# Altium PCB seed_sentinel.PcbDoc
Units mm, origin at the board's own origin, x right, y up, seen from the top; angles counter-clockwise.
Board outline 24.35 x 76.07 mm, 2 copper layers (Top Layer, Bottom Layer); 50 components, 33 nets, 167 pads, 51 vias.
Unrouted connection lines stored in the file: 31.
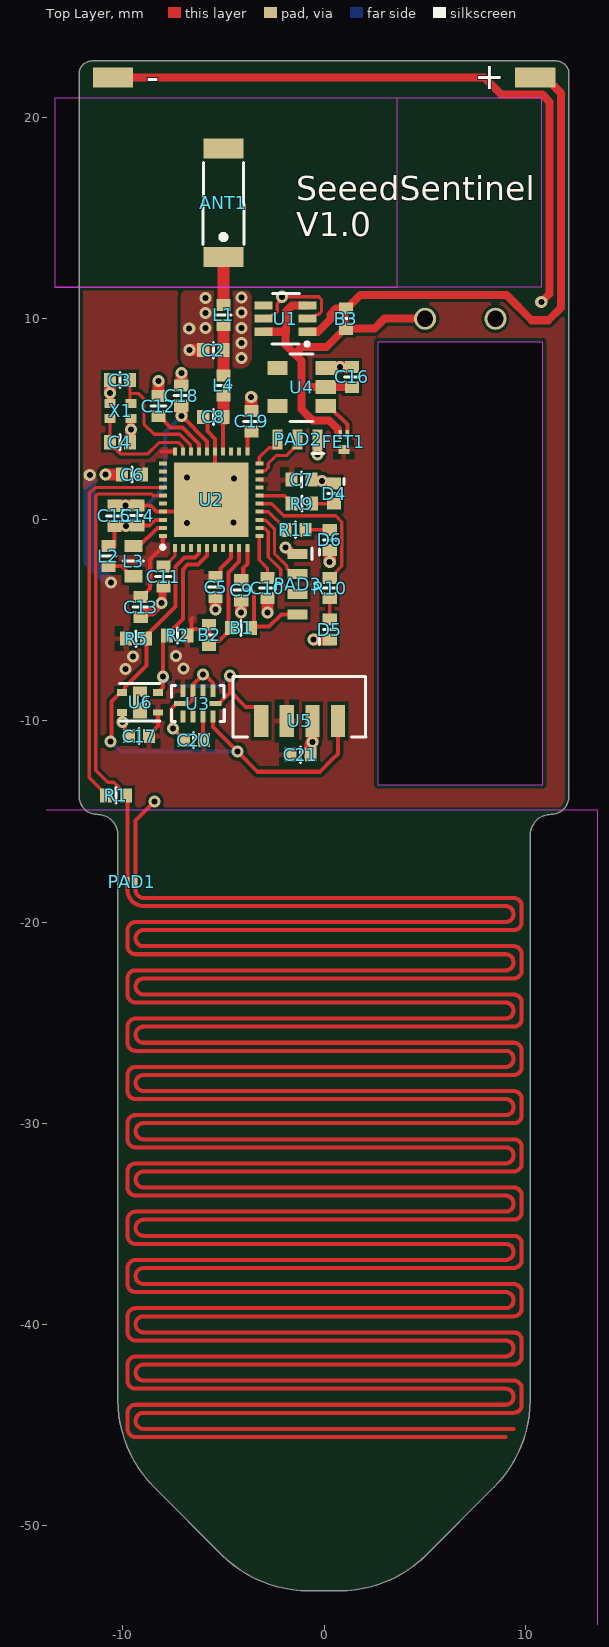
[diagram p0: Top Layer view]
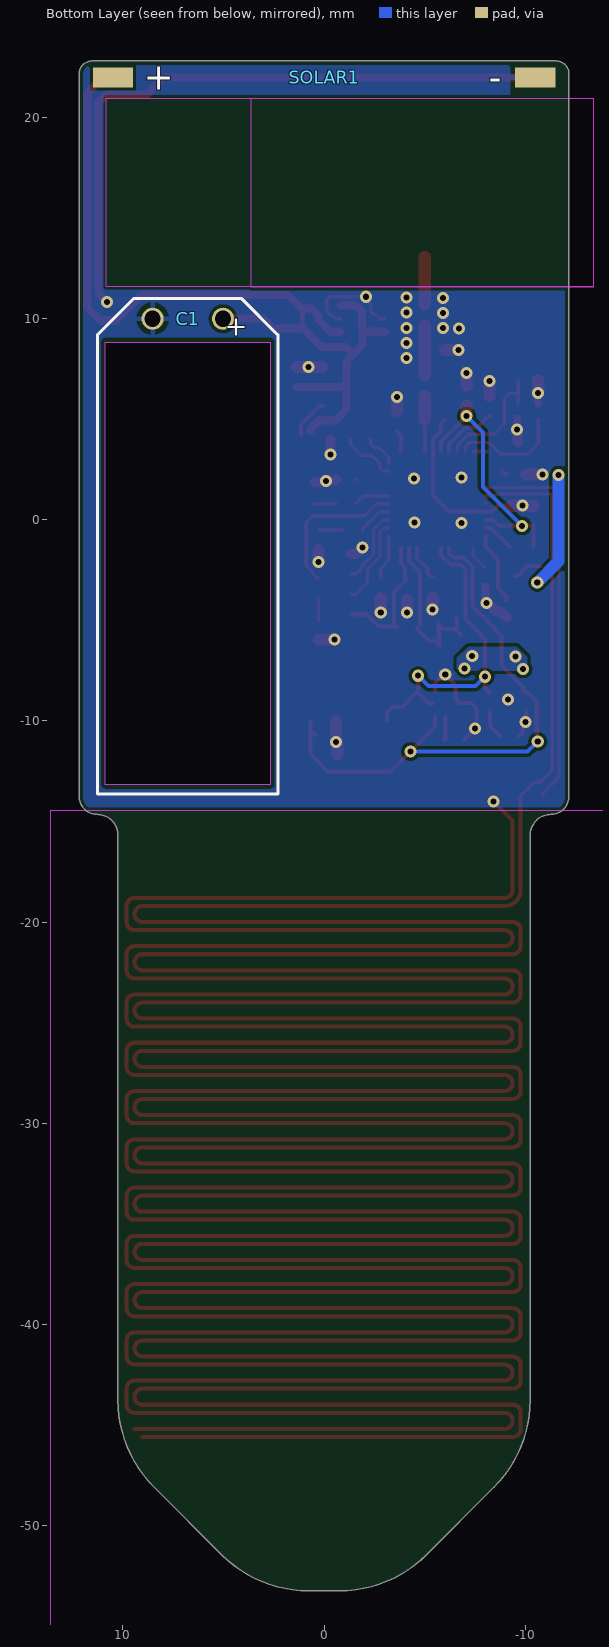
[diagram p1: Bottom Layer view, seen from below]

## Layer stack, top to bottom
Top Solder: solder mask 0.0102, Solder Resist, Dk 3.5
Top Layer: signal copper 0.0356
Dielectric 1: dielectric 0.32, FR-4, Dk 4.8
Bottom Layer: signal copper 0.0356
Bottom Solder: solder mask 0.0102, Solder Resist, Dk 3.5

## Board outline
-5.096,-51.454 ccw(c-0.76,-47.118) -0.76,-53.25 0.76,-53.25 ccw(c0.76,-47.118) 5.096,-51.454 8.454,-48.096 ccw(c4.118,-43.76) 10.25,-43.76 10.25,-15.675 cw(c11.275,-15.675) 11.275,-14.65 ccw(c11.275,-13.75) 12.175,-13.75 12.175,22.183 ccw(c11.541,22.183) 11.541,22.817 -11.496,22.817 -11.541,22.817 ccw(c-11.541,22.183) -12.175,22.183 -12.175,-13.75 ccw(c-11.275,-13.75) -11.275,-14.65 cw(c-11.275,-15.675) -10.25,-15.675 -10.25,-43.76 ccw(c-4.118,-43.76) -8.454,-48.096
cut-out: 2.675,-13.159 10.875,-13.159 10.875,8.841 2.675,8.841

## Design rules (kind name [scope] priority, off if disabled: settings)
BoardOutlineClearance [All] p1: gap=0.2 ignorepadtopadclearanceinfootprint=FALSE
Clearance [All] p1: gap=0.16 ignorepadtopadclearanceinfootprint=FALSE
ComponentClearance [All] p1: gap=0.2 collisioncheckmode=3 verticalgap=0.2 showdistances=FALSE
DiffPairsRouting DiffPair_DiffPairsRouting [InDifferentialPair ('USBD')] p1: maxlimit=0.254 minlimit=0.16 mostfreqgap=0.16 toplayer_minwidth=0.16 toplayer_maxwidth=0.381 toplayer_prefwidth=0.16 bottomlayer_minwidth=0.16 bottomlayer_maxwidth=0.381 bottomlayer_prefwidth=0.16 maxuncoupledlength=12.7
DiffPairsRouting [All] p2: maxlimit=0.254 minlimit=0.16 mostfreqgap=0.16 toplayer_minwidth=0.16 toplayer_maxwidth=0.381 toplayer_prefwidth=0.16 bottomlayer_minwidth=0.16 bottomlayer_maxwidth=0.381 bottomlayer_prefwidth=0.16 maxuncoupledlength=12.7
MatchedLengths DiffPair_MatchedLengths [InDifferentialPair ('USBD')] p1: tolerance=0.1 checknetsindiffpair=FALSE checkdiffpairvsdiffpair=TRUE checkxsignals=TRUE checkothers=TRUE
MinimumSolderMaskSliver [All] p1 off: minsoldermaskwidth=0.254
PolygonConnect PolygonConnect_5 [All vs IsNamedPolygon('GND_L02_P006')] p1: thpad.connectstyle=Relief thpad.reliefconductorwidth=0.254 thpad.reliefentries=4 thpad.polygonreliefangle="90 Angle" thpad.airgapwidth=0.254 smdpad.connectstyle=Relief smdpad.reliefconductorwidth=0.254 smdpad.reliefentries=4 smdpad.polygonreliefangle="90 Angle" smdpad.airgapwidth=0.254 via.connectstyle=Direct via.reliefconductorwidth=0.254 via.reliefentries=4 via.polygonreliefangle="90 Angle" via.airgapwidth=0.254
PolygonConnect PolygonConnect_4 [All vs IsNamedPolygon('VDD_L01_P004')] p2: thpad.connectstyle=Relief thpad.reliefconductorwidth=0.254 thpad.reliefentries=4 thpad.polygonreliefangle="90 Angle" thpad.airgapwidth=0.254 smdpad.connectstyle=Relief smdpad.reliefconductorwidth=0.254 smdpad.reliefentries=4 smdpad.polygonreliefangle="90 Angle" smdpad.airgapwidth=0.254 via.connectstyle=Direct via.reliefconductorwidth=0.254 via.reliefentries=4 via.polygonreliefangle="90 Angle" via.airgapwidth=0.254
PolygonConnect PolygonConnect_3 [All vs IsNamedPolygon('GND_L02_P005')] p3: thpad.connectstyle=Relief thpad.reliefconductorwidth=0.254 thpad.reliefentries=4 thpad.polygonreliefangle="90 Angle" thpad.airgapwidth=0.254 smdpad.connectstyle=Relief smdpad.reliefconductorwidth=0.254 smdpad.reliefentries=4 smdpad.polygonreliefangle="90 Angle" smdpad.airgapwidth=0.254 via.connectstyle=Direct via.reliefconductorwidth=0.254 via.reliefentries=4 via.polygonreliefangle="90 Angle" via.airgapwidth=0.254
PolygonConnect PolygonConnect_2 [All vs IsNamedPolygon('NONET_L01_P005')] p4: thpad.connectstyle=Relief thpad.reliefconductorwidth=0.254 thpad.reliefentries=4 thpad.polygonreliefangle="90 Angle" thpad.airgapwidth=0.254 smdpad.connectstyle=Relief smdpad.reliefconductorwidth=0.254 smdpad.reliefentries=4 smdpad.polygonreliefangle="90 Angle" smdpad.airgapwidth=0.254 via.connectstyle=Direct via.reliefconductorwidth=0.254 via.reliefentries=4 via.polygonreliefangle="90 Angle" via.airgapwidth=0.254
PolygonConnect PolygonConnect_1 [All vs IsNamedPolygon('NONET_L-01_P-001')] p5: connectstyle=Direct reliefconductorwidth=0.254 reliefentries=4 polygonreliefangle="90 Angle" airgapwidth=0.254
PolygonConnect [All] p6: connectstyle=Relief reliefconductorwidth=0.254 reliefentries=4 polygonreliefangle="90 Angle" airgapwidth=0.254
RoomDefinition seed_sentinel [InComponentClass('seed_sentinel')] p1 off: confinementstyle=ConfineIn formatcopy=TRUE lockcomponents=FALSE outline -303.253,-69.055 -307.317,-69.055 -307.317,-63.848 -303.253,-63.848
RoutingVias [All] p1: holewidth=0.3 width=0.6 viastyle="Through Hole" minholewidth=0.3 minwidth=0.6 maxholewidth=0.3 maxwidth=0.6
SilkToSolderMaskClearance [IsPad] p1 off: minsilkscreentomaskgap=0.254 clearancetoexposedcopper=TRUE
SolderMaskExpansion SolderMaskExpansion_1 [ISVia] p1: expansion=0.102 istentingtop=TRUE
SolderMaskExpansion [All] p2: expansion=0.102 istentingtop=FALSE
Width [All] p1: maxlimit=5 minlimit=0.16 preferedwidth=0.16
26 further rules are at their usual default settings.

## Classes and differential pairs
differential pair USBD: +USBD_P -USBD_N

## Components (designator, comment, footprint, x,y, rotation, side; value= is the part's Value field where it differs from the comment)
ANT1 "2.4GHz" ANT_RFANT5220110A2T -5.006,13.063 r0 top
B1 "SOLDER_BRIDGE_NO" SOLDER_BRIDGE_NO -4.631,-5.37 r0 top
B2 "SOLDER_BRIDGE_C" SOLDER_BRIDGE_NC -5.719,-5.221 r270 top net-tie
B3 "SOLDER_BRIDGE_C" SOLDER_BRIDGE_NC 1.081,10.504 r270 top net-tie
C1 "4F" CAP_8mm 6.775,11 r0 bottom
C2 "1.2p" CHIP_0402 -6.006,8.438 r0 top
C3 "12pF" CHIP_0402 -9.65,6.952 r180 top
C4 "12pF" CHIP_0402 -9.653,3.858 r180 top
C5 "4.7uF" CHIP_0402 -5.389,-2.843 r270 top
C6 "0.1uF" CHIP_0402 -9.05,2.25 r180 top
C7 "0.1uF" CHIP_0402 -1.619,2.004 r0 top
C8 "1.0p" CHIP_0402 -6.006,5.116 r0 top
C9 "4.7uF" CHIP_0402 -4.119,-2.996 r270 top
C10 "4.7uF" CHIP_0402 -2.819,-2.896 r270 top
C11 "0.1uF" CHIP_0402 -7.994,-2.321 r270 top
C12 "0.1uF" CHIP_0402 -8.236,5.16 r90 top
C13 "1uF" CHIP_0402 -9.117,-4.839 r90 top
C14 "47nF" CHIP_0402 -9.289,0.712 r270 top
C15 "1uF" CHIP_0402 -10.425,0.7 r270 top
C16 "0.1uF" CHIP_0402 1.381,6.604 r90 top
C17 "0.1uF" CHIP_0402 -8.698,-10.754 r180 top
C18 "DNM" CHIP_0402 -7.1,5.675 r90 top
C19 "820pF" CHIP_0402 -3.619,5.404 r270 top
C20 "0.1uF" CHIP_0402 -5.978,-10.953 r180 top
C21 "0.1uF" CHIP_0402 -1.675,-11.675 r0 top
D4 "BLU" LED_0402 0.494,0.804 r90 top
D5 "GRN" LED_0402 0.281,-4.958 r270 top
D6 "RED" LED_0402 0.281,-0.496 r270 top
FET1 "RV2C014BCT2CL" DFN1006-3 0.981,3.504 r90 top
L1 "2.2nH" CHIP_0402 -5.006,10.688 r270 top
L2 "15nH" CHIP_0402 -10.728,-1.303 r270 top
L3 "10uH" CHIP_0603 -9.482,-2.803 r90 top
L4 "4.7nH" CHIP_0402 -5.006,7.188 r270 top
PAD1 "MOISTURE_PROBE" MOIST_CAP -9.575,-18 r0 top
PAD2 "PADS" CON_PADS_3 -0.319,4.004 r180 top
PAD3 "PADS" CON_PADS_4 -1.319,-1.696 r270 top
R1 "1M" CHIP_0402 -9.85,-13.7 r180 top
R2 "10K" CHIP_0402 -7.8,-5.75 r0 top
R5 "10K" CHIP_0402 -9.85,-5.903 r0 top
R9 "130R" CHIP_0402 -0.606,0.804 r180 top
R10 "130R" CHIP_0402 0.281,-3.896 r90 top
R11 "130R" CHIP_0402 -0.919,-0.496 r180 top
SOLAR1 "KXOB25-02X8F" SOLAR 0,22.004 r180 bottom
U1 "LM66100DCKR" SC70-6 -0.819,9.354 r90 top
U2 "NRF52820-QDAA-R" "QFN40 5x5" -5.619,1.004 r90 top
U3 "TLA2022IRUGT" RQFP_10 -6.275,-9.133 r270 top
U4 "NCP302HSN18T1G" TSOP-5 0.081,5.654 r90 top
U5 "VEML7700-TR" VEML7700 -1.22,-10 r0 top
U6 "SHTC3" SHTC3 -9.15,-9.075 r180 top
X1 "XTAL_32M" ECS-320 -10.647,5.046 r0 top

## Footprints (in the part's own frame and the unit in brackets; to place one, negate y for a bottom-side part, rotate by r counter-clockwise, add the part's x,y. Pads: shape width x height; smd on the part's side, far side on the other; paste and mask are expansions set on the pad)
ANT_RFANT5220110A2T [mm]
  rect 2x1 smd: IN(0,0) NC(0,5.4)
  Keep-Out Layer region: -8.382,-1.5 8.636,-1.5 8.636,7.9 -8.382,7.9
  silkscreen extent -1.02,0.64 1.02,4.7
CAP_8mm [mm]
  round 1.1 hole 0.8: +(-1.75,1) -(1.75,1)
  silkscreen extent -4.47,0 4.49,24.64
CHIP_0402 [mm]
  rect 0.6x0.7 smd: 1(0,0) 2(1,0)
  silkscreen extent 0.5,-0.38 0.5,0.37
CHIP_0603 [mm]
  rect 0.6x0.9 smd: 1(0,0) 2(1.5,0)
  silkscreen extent 0.76,-0.51 0.76,0.51
CON_PADS_3 [mm]
  rect 0.5x1 smd: 1(0,0) 2(1,0) 3(2,0)
  silkscreen extent -0.3,0.71 0.28,0.71
CON_PADS_4 [mm]
  rect 0.5x1 smd: 1(0,0) 2(1,0) 3(2,0) 4(3,0)
  silkscreen extent -0.3,0.71 0.28,0.71
DFN1006-3 [mm]
  rect 0.45x0.55 smd: D(0,0)
  rect 0.45x0.18 smd: G(0.75,-0.177) S(0.75,0.177)
ECS-320 [mm]
  rect 0.55x0.45 smd: 1(0,0) 2(1.05,0) 3(1.05,0.75) 4(0,0.75)
LED_0402 [mm]
  rect 0.6x0.7 smd: A(0,0) C(1,0)
  silkscreen extent 0.5,-0.5 1.25,0.33
MOIST_CAP [mm]
  rect 0.2x0.5 smd mask+0: 1(-0.2,0) 2(0.2,0)
  Top Layer lines w0.2: -0.2,0 -0.2,-0.4 ccw(c0.6,-0.4) 0.6,-1.2 18.6,-1.2 cw(c18.6,-1.6) 19,-1.6 cw(c18.6,-1.6) 18.6,-2 13.4,-2 0.2,-2 ccw(c0.2,-2.4) -0.2,-2.4 -0.2,-3.2 ccw(c0.2,-3.2) 0.2,-3.6 18.6,-3.6 cw(c18.6,-4) 19,-4 cw(c18.6,-4) 18.6,-4.4 13.4,-4.4 0.2,-4.4 ccw(c0.2,-4.8) -0.2,-4.8 -0.2,-5.6 ccw(c0.2,-5.6) 0.2,-6 18.6,-6 cw(c18.6,-6.4) 19,-6.4 cw(c18.6,-6.4) 18.6,-6.8 13.4,-6.8 0.2,-6.8 ccw(c0.2,-7.2) -0.2,-7.2 -0.2,-8 ccw(c0.2,-8) 0.2,-8.4 18.6,-8.4 cw(c18.6,-8.8) 19,-8.8 cw(c18.6,-8.8) 18.6,-9.2 13.4,-9.2 0.2,-9.2 ccw(c0.2,-9.6) -0.2,-9.6 -0.2,-10.4 ccw(c0.2,-10.4) 0.2,-10.8 18.6,-10.8 cw(c18.6,-11.2) 19,-11.2 cw(c18.6,-11.2) 18.6,-11.6 13.4,-11.6 0.2,-11.6 ccw(c0.2,-12) -0.2,-12 -0.2,-12.8 ccw(c0.2,-12.8) 0.2,-13.2 18.6,-13.2 cw(c18.6,-13.6) 19,-13.6 cw(c18.6,-13.6) 18.6,-14 13.4,-14 0.2,-14 ccw(c0.2,-14.4) -0.2,-14.4 -0.2,-15.2 ccw(c0.2,-15.2) 0.2,-15.6 18.6,-15.6 cw(c18.6,-16) 19,-16 cw(c18.6,-16) 18.6,-16.4 13.4,-16.4 0.2,-16.4 ccw(c0.2,-16.8) -0.2,-16.8 -0.2,-17.6 ccw(c0.2,-17.6) 0.2,-18 18.6,-18 cw(c18.6,-18.4) 19,-18.4 cw(c18.6,-18.4) 18.6,-18.8 13.4,-18.8 0.2,-18.8 ccw(c0.2,-19.2) -0.2,-19.2 -0.2,-20 ccw(c0.2,-20) 0.2,-20.4 18.6,-20.4 cw(c18.6,-20.8) 19,-20.8 cw(c18.6,-20.8) 18.6,-21.2 13.4,-21.2 0.2,-21.2 ccw(c0.2,-21.6) -0.2,-21.6 -0.2,-22.4 ccw(c0.2,-22.4) 0.2,-22.8 18.6,-22.8 cw(c18.6,-23.2) 19,-23.2 cw(c18.6,-23.2) 18.6,-23.6 13.4,-23.6 0.2,-23.6 ccw(c0.2,-24) -0.2,-24 -0.2,-24.8 ccw(c0.2,-24.8) 0.2,-25.2 18.6,-25.2 cw(c18.6,-25.6) 19,-25.6 cw(c18.6,-25.6) 18.6,-26 13.4,-26 0.2,-26 ccw(c0.2,-26.4) -0.2,-26.4 -0.2,-27.2 ccw(c0.2,-27.2) 0.2,-27.6 18.6,-27.6 ; 0.2,0 0.2,-0.4 ccw(c0.6,-0.4) 0.6,-0.8 19,-0.8 cw(c19,-1.2) 19.4,-1.2 19.4,-2 cw(c19,-2) 19,-2.4 14.2,-2.4 4.2,-2.4 0.6,-2.4 ccw(c0.6,-2.8) 0.2,-2.8 ccw(c0.6,-2.8) 0.6,-3.2 19,-3.2 cw(c19,-3.6) 19.4,-3.6 19.4,-4.4 cw(c19,-4.4) 19,-4.8 14.2,-4.8 4.2,-4.8 0.6,-4.8 ccw(c0.6,-5.2) 0.2,-5.2 ccw(c0.6,-5.2) 0.6,-5.6 19,-5.6 cw(c19,-6) 19.4,-6 19.4,-6.8 cw(c19,-6.8) 19,-7.2 14.2,-7.2 4.2,-7.2 0.6,-7.2 ccw(c0.6,-7.6) 0.2,-7.6 ccw(c0.6,-7.6) 0.6,-8 19,-8 cw(c19,-8.4) 19.4,-8.4 19.4,-9.2 cw(c19,-9.2) 19,-9.6 14.2,-9.6 4.2,-9.6 0.6,-9.6 ccw(c0.6,-10) 0.2,-10 ccw(c0.6,-10) 0.6,-10.4 19,-10.4 cw(c19,-10.8) 19.4,-10.8 19.4,-11.6 cw(c19,-11.6) 19,-12 14.2,-12 4.2,-12 0.6,-12 ccw(c0.6,-12.4) 0.2,-12.4 ccw(c0.6,-12.4) 0.6,-12.8 19,-12.8 cw(c19,-13.2) 19.4,-13.2 19.4,-14 cw(c19,-14) 19,-14.4 14.2,-14.4 4.2,-14.4 0.6,-14.4 ccw(c0.6,-14.8) 0.2,-14.8 ccw(c0.6,-14.8) 0.6,-15.2 19,-15.2 cw(c19,-15.6) 19.4,-15.6 19.4,-16.4 cw(c19,-16.4) 19,-16.8 14.2,-16.8 4.2,-16.8 0.6,-16.8 ccw(c0.6,-17.2) 0.2,-17.2 ccw(c0.6,-17.2) 0.6,-17.6 19,-17.6 cw(c19,-18) 19.4,-18 19.4,-18.8 cw(c19,-18.8) 19,-19.2 14.2,-19.2 4.2,-19.2 0.6,-19.2 ccw(c0.6,-19.6) 0.2,-19.6 ccw(c0.6,-19.6) 0.6,-20 19,-20 cw(c19,-20.4) 19.4,-20.4 19.4,-21.2 cw(c19,-21.2) 19,-21.6 14.2,-21.6 4.2,-21.6 0.6,-21.6 ccw(c0.6,-22) 0.2,-22 ccw(c0.6,-22) 0.6,-22.4 19,-22.4 cw(c19,-22.8) 19.4,-22.8 19.4,-23.6 cw(c19,-23.6) 19,-24 14.2,-24 4.2,-24 0.6,-24 ccw(c0.6,-24.4) 0.2,-24.4 ccw(c0.6,-24.4) 0.6,-24.8 19,-24.8 cw(c19,-25.2) 19.4,-25.2 19.4,-26 cw(c19,-26) 19,-26.4 14.2,-26.4 4.2,-26.4 0.6,-26.4 ccw(c0.6,-26.8) 0.2,-26.8 ccw(c0.6,-26.8) 0.6,-27.2 19,-27.2
"QFN40 5x5" [mm]
  rect 3.7x3.7 smd: 0(0,0)
  rect 0.4x0.2 smd: 1(-2.4,1.8) 2(-2.4,1.4) 3(-2.4,1) 4(-2.4,0.6) 5(-2.4,0.2) 6(-2.4,-0.2) 7(-2.4,-0.6) 8(-2.4,-1) 9(-2.4,-1.4) 10(-2.4,-1.8) 21(2.4,-1.8) 22(2.4,-1.4) 23(2.4,-1) 24(2.4,-0.6) 25(2.4,-0.2) 26(2.4,0.2) 27(2.4,0.6) 28(2.4,1) 29(2.4,1.4) 30(2.4,1.8)
  rect 0.2x0.4 smd: 11(-1.8,-2.4) 12(-1.4,-2.4) 13(-1,-2.4) 14(-0.6,-2.4) 15(-0.2,-2.4) 16(0.2,-2.4) 17(0.6,-2.4) 18(1,-2.4) 19(1.4,-2.4) 20(1.8,-2.4) 31(1.8,2.4) 32(1.4,2.4) 33(1,2.4) 34(0.6,2.4) 35(0.2,2.4) 36(-0.2,2.4) 37(-0.6,2.4) 38(-1,2.4) 39(-1.4,2.4) 40(-1.8,2.4)
  silkscreen extent -2.42,2.35 -2.31,2.46
RQFP_10 [mm]
  rect 0.6x0.25 smd: 1(-0.635,0.75) 2(-0.635,0.25) 3(-0.635,-0.25) 4(-0.635,-0.75) 6(0.635,-0.75) 7(0.635,-0.25) 8(0.635,0.25) 9(0.635,0.75)
  rect 0.25x0.6 smd: 5(0,-0.885) 10(0,0.885)
  silkscreen extent -0.9,-1.31 0.89,1.31
SC70-6 [mm]
  rect 0.4x0.9 smd: 1(0,0) 2(0.65,0) 3(1.3,0) 4(1.3,2.2) 5(0.65,2.2) 6(0,2.2)
  silkscreen extent -0.66,-0.03 1.91,1.78
SHTC3 [mm]
  rect 0.5x0.3 smd: 1(-0.9,0.5)
  rect 0.5x0.35 smd: 2(-0.9,-0.5) 3(0.9,-0.5) 4(0.9,0.5)
  rect 0.7x1.6 smd: 4(0,0)
  silkscreen extent -0.99,-0.94 1.02,0.93
SOLAR [mm]
  rect 2x1 smd far side: +(-10.5,0) -(10.5,0)
  rect 2x1 smd: +(-10.5,0) -(10.5,0)
SOLDER_BRIDGE_NC [mm]
  rect 0.6x0.7 smd: 1(0,0) 2(1,0)
  Top Layer lines w0.254: 1,0 0,0
  silkscreen extent 0.5,-0.38 0.5,0.37
SOLDER_BRIDGE_NO [mm]
  rect 0.6x0.7 smd: 1(0,0) 2(1,0)
  silkscreen extent 0.5,-0.37 0.5,0.37
TSOP-5 [mm]
  rect 0.7x1 smd: 1(0,0) 2(0.95,0) 3(1.9,0) 4(1.9,2.4) 5(0,2.4)
  silkscreen extent -0.76,0.63 2.59,1.78
VEML7700 [mm]
  rect 0.7x1.6 smd: 1(-1.905,0) 2(-0.635,0) 3(0.635,0) 4(1.905,0)
  silkscreen extent -3.3,-0.8 3.3,2.21

## Part data
ANT1: library part ANT_2G4_CHIP_RFANT5220110A2T, "2.4GHz chip antenna", Supplier Part Number 1=1292-1001-1-ND, Supplier 1=Digi-Key
B2 B3: library part SOLDER_BRIDGE_NC
C1: library part CAP_4_THRU, "4F 3V supercap", Supplier Part Number 1=338-DSF405M3R0-ND, Supplier 1=Digi-Key
C2: library part CAP_1.2p_0402, "1.2pF RF capacitor", Supplier Part Number 1=478-10145-1-ND, Supplier 1=Digi-Key
C3 C4: library part CAP_12p_0402, "12pF NP0 0603 Capacitor", Supplier Part Number 1=399-19370-1-ND, Supplier 1=Digi-Key
C5 C9 C10: library part CAP_4.7u_0402, "4.7uF 0603 6.3V", Supplier Part Number 1=587-3711-1-ND, Supplier 1=Digi-Key
C6 C7 C11 C12 C16 C17 C20 C21: library part CAP_100p_0402, "0.1uF X7R 0805 Capacitor", Supplier Part Number 1=1276-1004-1-ND, Supplier 1=Digi-Key
C8: library part CAP_1.0p_0402, "1.0pF RF capacitor", Supplier Part Number 1=732-13231-1-ND, Supplier 1=Digi-Key
C13 C15: library part CAP_1u_0402, Supplier Part Number 1=490-13339-1-ND, Supplier 1=Digi-Key
C14: library part CAP_47n_0402, "47nF 0603 6.3V", Supplier Part Number 1=1292-1213-1-ND, Supplier 1=Digi-Key
C18: library part CAP_DNM_0402
C19: library part CAP_820p_0402, "820pF X7R 0805 Capacitor", Supplier Part Number 1=311-3776-1-ND, Supplier 1=Digi-Key
D4: library part LED_BLU_0402, Supplier Part Number 1=350-4448-1-ND, Supplier 1=Digi-Key
D5: library part LED_GRN_0402, Supplier Part Number 1=754-1811-1-ND, Supplier 1=Digi-Key
D6: library part LED_RED_0402, Supplier Part Number 1=1080-EAST1005RA0CT-ND, Supplier 1=Digi-Key
FET1: library part FET_20V_200mA, Supplier Part Number 1=RV2C014BCT2CLCT-ND, Supplier 1=Digi-Key
L1: library part IND_2.2n_0402, "2.2nH high frequency", Supplier Part Number 1=445-9409-1-ND, Supplier 1=Digi-Key
L2: library part IND_15n_0402, "15nH chip inductor", Supplier Part Number 1=2184-BSCH0010050515NJCPCT-ND, Supplier 1=Digi-Key
L3: library part IND_10u_0402, "10uH chip inductor", Supplier Part Number 1=535-11587-1-ND, Supplier 1=Digi-Key
L4: library part IND_4.7n_0402, "4.7nH high frequency", Supplier Part Number 1=445-9417-1-ND, Supplier 1=Digi-Key
PAD2: library part CON_PADS_3
PAD3: library part CON_PADS_4
R1: library part RES_1M_0402, "1Mohm", Supplier Part Number 1=2037-PFR05S-105-FNHCT-ND, Supplier 1=Digi-Key
R2 R5: library part RES_10K_0402, "10Kohm", Supplier Part Number 1=CR0402-FX-1002GLFCT-ND, Supplier 1=Digi-Key
R9 R10 R11: library part RES_130R_0402, "130ohm", Supplier Part Number 1=RMCF0402JT130RCT-ND, Supplier 1=Digi-Key
SOLAR1: library part SOLAR_5V5_6m3, "26.3mW 6.3mA 5.53V", Supplier Part Number 1=KXOB25-02X8F-ND, Supplier 1=Digi-Key
U1: library part DIO_IDEAL, "Ideal diode", Supplier Part Number 1=296-53541-1-ND, Supplier 1=Digi-Key
U2: Supplier Part Number 1=1490-NRF52820-QDAA-RCT-ND, Supplier 1=Digi-Key
U3: library part SEN_ADC_TLA2022IRUGT, Supplier Part Number 1=296-48345-1-ND, Supplier 1=Digi-Key
U4: library part LVC_1.8V, "1.8V low voltage cutoff", Supplier Part Number 1=488-NCP302HSN18T1GCT-ND, Supplier 1=Digi-Key
U5: library part SEN_LIGHT_VEML7700, Supplier Part Number 1=VEML7700CT-ND, Supplier 1=Digi-Key
U6: library part SEN_TEMP_HUMID_SHTC3, Supplier Part Number 1=1649-1105-1-ND, Supplier 1=Digi-Key
X1: Supplier Part Number 1=50-ECS-320-8-47B-CKY-CT-ND, Supplier 1=Digi-Key

## Via types
v1: diameter 0.6, hole 0.3, Top Layer to Bottom Layer, tented both sides, 51 vias

## Nets (pads, with @x,y where several pads share a name; then routed paths per layer and width w, separated by ;. In a path a pad name is that pad's centre, name@x,y a point inside that pad or via, vN(x,y) a via of type N, cw(c..) or ccw(c..) an arc to the next point about the centre after c; other vN are vias at no path point)
GND: C1.- C2.1 C3.2 C4.1 C5.2 C6.2 C7.2 C8.1 C9.2 C10.2 C11.2 C12.2 C13.1 C14.1 C15.1 C16.2 C17.2 C18.2 C19.1 C20.2 C21.2 D4.C D5.C D6.C PAD1.2 PAD2.1 PAD3.1 SOLAR1.- U1.2 U1.5 U2.0 U2.25 U2.37 U3.1 U3.3 U3.5 U4.3 U5.3 U6.4 X1.2 X1.4 | length 78.7
  Top Layer w0.16: U1.5 -2.769,10.004 -2.559,10.214 -2.469,10.214 -2.329,10.355 -2.329,10.736 -2.089,10.975 v1(-2.089,11.095) -0.27,11.095 -0.129,10.953 -0.129,10.355 -0.269,10.214 -0.359,10.214 -0.569,10.004 U1.2
  Top Layer w0.2: v1(-10.864,2.263) v1@-10.851,2.25 ; v1@-10.05,-10.05 U6.4@-10.05,-9.575 ; v1(-10.015,-10.05) -10.015,-10.158 -9.898,-10.275 -9.898,-10.554 C17.2 ; PAD1.2 -9.375,-14.954 v1(-8.425,-14.004) ; C14.1 -8.639,0.712 -8.331,0.404 U2.37 -6.219,0.404 U2.0 -5.419,1.204 U2.25 -5.419,4.029 -5.806,4.417 -5.806,4.788 C8.1@-6.006,4.988 ; U6.4@-9.15,-9.075 -9.15,-8.875 -9.147,-8.878 v1(-9.147,-8.94) ; C12.2 C12.2@-8.231,6.164 ; C18.2@-7.102,6.677 C18.2 ; C20.2 -6.978,-10.903 v1(-7.503,-10.378) -7.587,-10.294 -7.587,-9.385 -7.31,-9.108 -6.708,-9.108 -6.55,-8.95 -6.55,-8.523 U3.3 ; U3.3@-6.525,-8.323 U3.3 ; v1@-6.025,-7.705 -6.531,-8.211 -6.531,-8.492 U3.3 ; v1(-6.025,-7.7) -5.933,-7.7 -5.525,-8.107 -5.525,-8.497 U3.1@-5.525,-8.323 ; C9.2@-4.125,-4.188 -4.144,-4.169 -4.125,-4.15 -4.199,-4.076 -4.125,-4.002 C9.2 ; v1(-3.622,6.112) -3.619,6.108 C19.1 ; v1(-0.099,1.935) -0.072,1.935 0.363,1.935 0.444,1.854 D4.C ; D5.C@0.163,-5.927 0.194,-5.958 0.294,-6.058 D5.C@0.394,-5.958
  Top Layer w0.4: X1.4 -10.643,5.8 -10.643,6.293 v1(-10.638,6.298) ; SOLAR1.-@-10.5,22.004 7.946,22.004 8.806,21.144 10.856,21.144 11.215,20.785 11.215,11.24 v1(10.8,10.825) ; X1.2 X1.2 -9.595,4.504 v1(-9.593,4.502) ; v1@-8.129,-4.125 -8.037,-4.033 -8.037,-3.364 C11.2 ; v1@-8.113,-4.087 -8.102,-4.098 v1(-8.075,-4.125) ; U4.3 0.106,7.579 0.756,7.579 v1(0.781,7.604)
  Top Layer w0.5: C4.1 -9.612,3.899 -9.612,4.483 v1(-9.593,4.502) ; C13.1 -9.067,-4.839 -8.777,-4.549 -8.553,-4.549 v1@-8.129,-4.125 ; v1(-1.919,-1.371) -1.894,-1.371 -1.569,-1.696 PAD3.1 ; C7.2 -0.569,1.954 -0.118,1.954 v1(-0.099,1.935) ; PAD2.1 -0.319,3.255 v1(-0.316,3.253) ; v1@-0.072,1.935 0.01,1.854 D4.C@0.444,1.854
  Top Layer w0.6: v1(-10.864,2.263) -10.05,2.263 C6.2 ; C3.2 -10.65,6.31 v1(-10.638,6.298) ; C15.1 -9.351,0.7 -9.339,0.712 C14.1 ; C12.2 -8.231,6.16 -8.231,6.164 v1(-8.231,6.913) ; C18.2 -7.091,6.675 v1(-7.091,7.306) ; v1(-6.681,8.438) C2.1 ; v1(-5.388,-4.461) C5.2@-5.388,-3.844 ; v1(-4.125,-4.6) -4.125,-4.002 -4.125,-3.996 C9.2 ; v1(-3.622,6.112) -3.622,5.404 C19.1 ; v1(-2.819,-4.596) C10.2 ; C21.2 -0.675,-11.14 v1(-0.585,-11.05) U5.3 ; v1(-0.528,-5.958) 0.194,-5.958 D5.C ; U4.3@0.106,7.579 0.131,7.604 v1(0.781,7.604) C16.2 ; v1(0.281,-2.096) D6.C
  other v1: -6.825,-0.15 -4.5,-0.125 -9.87,0.704 -4.475,2.05 -6.825,2.1 -4.1,8.05 -4.1,8.8 -6.705,9.516 -5.906,9.538 -4.1,9.55 -5.906,10.288 -4.1,10.3 -5.906,11.038 -4.1,11.05
I2C_SCL: R2.1 U2.5 U3.10 U5.1 U6.2 | length 16.5
  Top Layer w0.2: U6.2 -8.175,-8.575 -8.1,-8.5 -8.1,-8.425 -8,-8.325 v1(-8,-7.8) -8,-5.95 R2.1 -7.8,-5.7 -7.024,-4.924 -7.024,-2.47 -6.785,-2.231 -6.277,-2.231 -5.819,-1.773 U2.5 ; U3.10 -5.215,-9.133 -4.675,-8.593 -4.675,-8.52 ; v1(-4.675,-7.75) -4.675,-8.52 ; U5.1 -3.125,-9.55 -3.375,-9.3 -3.895,-9.3 -4.675,-8.52
  Bottom Layer w0.2: v1(-8,-7.8) -7.54,-8.26 -5.185,-8.26 v1(-4.675,-7.75)
I2C_SDA: R5.2 U2.4 U3.9 U5.4 U6.3 | length 28.4
  Top Layer w0.2: v1(-10.625,-11.025) -10.575,-10.975 -10.575,-9.025 -10.125,-8.575 U6.3 -9.975,-8.575 -9.9,-8.5 -9.9,-8.307 -8.825,-7.232 -8.825,-5.75 -8.747,-5.75 -8.65,-5.653 -8.65,-5.575 -8.215,-5.14 -7.384,-4.309 -7.384,-2.321 -6.934,-1.871 -6.426,-1.871 -6.219,-1.664 U2.4 ; U3.9 -5.525,-10.3 v1(-4.3,-11.525) -3.3,-12.525 -0.2,-12.525 0.425,-11.9 0.685,-11.64 U5.4@0.685,-10.45 ; U5.4@0.435,-10.7 U5.4@0.685,-10.45 ; U5.4 U5.4@0.685,-10.45
  Bottom Layer w0.2: v1(-10.625,-11.025) -10.125,-11.525 v1(-4.3,-11.525)
LED_BLUE: R9.2 U2.16 | length 1.8
  Top Layer w0.16: U2.16 -1.956,1.204 -1.606,0.854 R9.2
LED_GREEN: R10.2 U2.15 | length 7.5
  Top Layer w0.16: U2.15 -2.608,0.804 -2.008,0.204 0.571,0.204 0.881,-0.107 0.881,-2.296 0.551,-2.626 0.551,-2.676 0.331,-2.896 R10.2
LED_RED: R11.2 U2.14 | length 1.7
  Top Layer w0.16: U2.14 -2.769,0.404 -1.919,-0.446 R11.2
MOIST_SENSE: PAD1.1 R1.1 U2.35 | length 23.4
  Top Layer w0.16: R1.1@-9.85,-13.65 -10.45,-13.05 -10.75,-13.05 -11.35,-12.45 -11.35,1.19 -11.256,1.284 -8.575,1.284 -8.495,1.204 U2.35
  Top Layer w0.2: R1.1@-9.85,-13.65 -9.775,-13.725 PAD1.1
MOIST_TRIG: R1.2 U2.34 | length 19.1
  Top Layer w0.16: R1.2 -10.85,-13.65 -11.675,-12.825 -11.675,1.318 -11.389,1.604 U2.34
NetANT1_IN: ANT1.IN L1.1 | length 2.4
  Top Layer w0.6: L1.1 ANT1.IN
NetB1_1: B1.1 B2.2 U2.9 | length 5.5
  Top Layer w0.2: B2.2 -5.519,-6.021 -5.231,-6.021 -4.631,-5.42 B1.1 ; B1.1@-4.759,-5.236 -4.759,-2.618 -4.219,-2.078 U2.9
NetB3_1: B3.1 SOLAR1.+ U1.1 | length 26.5
  Top Layer w0.4: U1.1 -0.31,9.354 0.311,9.975 0.311,10.221 0.594,10.504 B3.1 1.131,10.504 1.802,11.175 9.075,11.175 10.325,9.925 11.15,9.925 11.775,10.55 11.775,21.229 11,22.004 SOLAR1.+@10.5,22.004
NetC2_2: C2.2 L1.2 L4.1 | length 2.5
  Top Layer w0.6: L4.1 C2.2 L1.2
NetC3_1: C3.1 U2.28 X1.3 | length 6.3
  Top Layer w0.16: C3.1 -9.65,6.288 -9.65,5.849 X1.3 ; -9.606,6.288 -9.231,6.288 -8.956,6.013 -8.956,4.763 -8.453,4.259 -7.182,4.259 -6.639,3.716 -6.639,3.424 U2.28
NetC4_2: C4.2 U2.29 X1.1 | length 5.7
  Top Layer w0.16: X1.1 -10.647,4.455 -10.647,3.864 C4.2 -10.653,3.808 -10.113,3.268 -8.785,3.268 -8.209,3.844 -7.219,3.844 -7.039,3.663 -7.039,3.424 U2.29
NetC8_2: C8.2 L4.2 U2.24 | length 2.8
  Top Layer w0.2: U2.24 -5.019,4.975 C8.2@-5.006,4.988
  Top Layer w0.6: C8.2@-5.006,4.988 L4.2
NetC10_1: C10.1 U2.11 | length 2.3
  Top Layer w0.16: U2.11 -3.219,-1.996 -2.819,-2.396 C10.1
NetC11_1: C11.1 U2.1 | length 1.2
  Top Layer w0.16: C11.1 -7.944,-2.321 -7.419,-1.796 U2.1
NetC12_1: C12.1 U2.27 | length 3
  Top Layer w0.2: C12.1 -8.186,5.16 -7.625,4.599 -7.041,4.599 -6.219,3.777 U2.27
NetC19_2: C19.2 U2.21 | length 1.1
  Top Layer w0.2: U2.21 -3.819,4.204 C19.2
NetD4_A: D4.A R9.1 | length 1.1
  Top Layer w0.16: R9.1 D4.A
NetD5_A: D5.A R10.1 | length 1.1
  Top Layer w0.16: D5.A@0.281,-4.996 R10.1
NetD6_A: D6.A R11.1 | length 1.2
  Top Layer w0.16: R11.1 D6.A
NetFET1_G: FET1.G U4.1 | length 1.9
  Top Layer w0.2: U4.1 0.231,5.654 1.154,4.731 1.154,4.258 FET1.G
NetL2_2: L2.2 L3.1 | length 1.5
  Top Layer w0.2: L2.2 -10.078,-2.303 -10.056,-2.325 -9.832,-2.549 -9.832,-2.603 -9.632,-2.803 L3.1
NetL3_2: L3.2 U2.39 | length 1.6
  Top Layer w0.2: L3.2@-9.245,-1.355 -8.286,-0.396 U2.39
NRF_1V3: C14.2 C15.2 C18.1 L2.1 U2.26 U2.38 | length 13
  Top Layer w0.2: L2.1@-10.425,-1.325 C15.2 -10.413,-0.288 -9.848,-0.288 C14.2 -8.688,-0.288 -8.396,0.004 U2.38 ; C18.1 C18.1@-7.086,5.661 ; v1(-7.086,5.16) -7.074,5.16 -5.819,3.904 U2.26
  Top Layer w0.6: C18.1 -7.086,5.675 -7.086,5.661 v1(-7.086,5.16)
  Bottom Layer w0.2: v1(-9.848,-0.305) -7.9,1.643 -7.9,4.346 v1(-7.086,5.16)
SWDCLK: PAD2.3 U2.20 | length 1.7
  Top Layer w0.16: U2.20 -3.219,3.104 -2.739,3.584 -2.489,3.584 -2.319,3.754 PAD2.3
SWDIO: PAD2.2 U2.19 | length 2.8
  Top Layer w0.16: U2.19 -3.199,2.424 -2.959,2.424 -2.779,2.605 -2.779,2.804 -2.389,3.194 -1.879,3.194 -1.319,3.754 PAD2.2
USBD_N: PAD3.3 U2.12 | length 4.4
  Top Layer w0.16: U2.12 -3.199,-0.416 -2.959,-0.416 -2.779,-0.597 -2.779,-1.847 -2.159,-2.466 -2.159,-3.106 -1.569,-3.696 PAD3.3
USBD_P: PAD3.2 U2.13 | length 3.8
  Top Layer w0.16: U2.13 -3.199,-0.016 -2.907,-0.016 -2.459,-0.464 -2.459,-1.696 -1.839,-2.316 -1.839,-2.426 -1.569,-2.696 PAD3.2
VBATT: B3.2 C1.+ C16.1 FET1.S U1.3 U1.6 U4.2 | length 19.1
  Top Layer w0.4: U1.6 -1.969,9.354 -1.919,9.304 ; U1.3 -1.596,10.654 -1.889,10.361 -1.889,9.334 -1.919,9.304 ; 0.681,4.404 0.681,4.517 0.254,4.944 -0.568,4.944 -1.125,5.501 -1.125,6.604 ; C16.1 U4.2 -1.125,6.604 ; C1.+@4.581,10.004 3.012,10.004 2.512,9.504 B3.2 1.031,9.504 0.131,8.604 -1.1,8.604 -1.46,8.245 ; -1.919,9.304 -1.919,8.704 -1.46,8.245 ; -1.46,8.245 -1.125,7.91 -1.125,6.604
VBUS: B1.2 C9.1 PAD3.4 U2.10 | length 6.9
  Top Layer w0.2: U2.10 -3.819,-2.196 -4.019,-2.396 -4.019,-2.896 C9.1 -4.069,-2.996 -3.477,-3.587 -3.477,-5.143 -3.631,-5.296 -2.727,-5.296 -2.127,-4.696 PAD3.4
VDD: B2.1 C5.1 C6.1 C7.1 C13.2 C17.1 C20.1 C21.1 FET1.D R2.2 R5.1 U2.8 U2.18 U2.30 U2.40 U3.4 U3.8 U5.2 U6.1 | length 16.9
  Top Layer w0.2: C13.2 -9.067,-3.839 -8.65,-3.421 ; C13.2@-9.05,-4.037 C13.2@-9.05,-3.987 ; C6.1@-9.05,2.3 C6.1 C6.1@-8.85,2.45 ; C17.1 -8.698,-10.704 -8.25,-10.257 U6.1 ; -8.65,-3.243 -8.65,-3.421 ; -8.086,3.404 U2.30 ; U2.40 -8.019,-1.328 -8.65,-1.96 -8.65,-3.421 ; R2.2 -6.8,-5.7 R2.2@-6.6,-5.5 ; -6.543,-4.88 -6.6,-4.937 R2.2@-6.6,-5.5 ; U3.8 -6.025,-10.906 C20.1 ; B2.1 -5.919,-5.421 -6.196,-5.421 -6.2,-5.425 -6.475,-5.425 -6.55,-5.5 R2.2@-6.6,-5.5 ; C5.1@-5.439,-2.843 C5.1 -5.339,-2.843 -5.139,-2.643 -5.139,-2.416 -4.619,-1.896 U2.8
  Bottom Layer w0.6: v1(-11.65,2.225) -11.65,-2.075 v1(-10.6,-3.125)
  other v1: -9.885,-7.411 -6.992,-7.399 -9.51,-6.786 -7.367,-6.774
pads on no net: ANT1.NC U1.4 U2.2 U2.3 U2.6 U2.7 U2.17 U2.22 U2.23 U2.31 U2.32 U2.33 U2.36 U3.2 U3.6 U3.7 U4.4 U4.5
copper on no net: | length 0
  Top Layer w0.16: -8.039,0.824 -8.019,0.804

## Polygon pours and split planes (outlines as drawn)
GND on Top Layer "NONET_L-01_P-001" (solid, pour order 3): -6.573,11.563 ccw(c-6.573,11.004) -7.131,11.004 -7.131,8.096 ccw(c-6.573,8.096) -6.573,7.538 -4.156,7.538 ccw(c-4.156,8.088) -3.606,8.088 -3.606,11.004 ccw(c-4.165,11.004) -4.165,11.563
VDD on Top Layer "VDD_L01_P004" (solid, remove dead copper, pour order 4): -5.096,-51.454 ccw(c-0.76,-47.118) -0.76,-53.25 0.76,-53.25 ccw(c0.76,-47.118) 5.096,-51.454 8.454,-48.096 ccw(c4.118,-43.76) 10.25,-43.76 10.25,-15.675 cw(c11.275,-15.675) 11.275,-14.65 ccw(c11.275,-13.75) 12.175,-13.75 12.175,22.183 ccw(c11.541,22.183) 11.541,22.817 -11.496,22.817 -11.541,22.817 ccw(c-11.541,22.183) -12.175,22.183 -12.175,-13.75 ccw(c-11.275,-13.75) -11.275,-14.65 cw(c-11.275,-15.675) -10.25,-15.675 -10.25,-43.76 ccw(c-4.118,-43.76) -8.454,-48.096
GND on Bottom Layer "GND_L02_P006" (solid, pour order 6): -5.096,-51.454 ccw(c-0.76,-47.118) -0.76,-53.25 0.76,-53.25 ccw(c0.76,-47.118) 5.096,-51.454 8.454,-48.096 ccw(c4.118,-43.76) 10.25,-43.76 10.25,-15.675 cw(c11.275,-15.675) 11.275,-14.65 ccw(c11.275,-13.75) 12.175,-13.75 12.175,22.183 ccw(c11.541,22.183) 11.541,22.817 -11.496,22.817 -11.541,22.817 ccw(c-11.541,22.183) -12.175,22.183 -12.175,-13.75 ccw(c-11.275,-13.75) -11.275,-14.65 cw(c-11.275,-15.675) -10.25,-15.675 -10.25,-43.76 ccw(c-4.118,-43.76) -8.454,-48.096
VDD on Bottom Layer "NONET_L-01_P-001" (solid, pour order 5): -9.421,-6.304 -7.157,-6.304 -6.6,-6.861 -6.6,-7.378 -6.722,-7.5 -9.815,-7.5 -9.821,-7.494 -9.955,-7.494 -10.1,-7.349 -10.1,-6.827 -9.583,-6.31

## Keep-outs
Keep-Out Layer:
  rectangle: -15.525,-55.075 13.6,-14.45
  rectangle: -13.388,11.6 10.825,20.963

## Other copper
Top Layer:
  pour cut-out: -4.178,7.538 cw(c-4.178,6.979) -3.619,6.979 -3.619,3.963 cw(c-4.178,3.963) -4.178,3.404 -6.527,3.404 cw(c-6.527,3.963) -7.086,3.963 -7.086,6.979 cw(c-6.527,6.979) -6.527,7.538

## Silkscreen, mask and mechanical layers (free items; w line width, h text height)
Top Overlay:
  text "SeeedSentinel / V1.0" at -1.375,14.1 h1.2
Mechanical 1:
  pour cut-out: 2.675,-13.159 10.875,-13.159 10.875,8.841 2.675,8.841
  pour cut-out: 2.675,-13.159 10.875,-13.159 10.875,8.841 2.675,8.841
  lines w0.15: -11.541,22.817 ccw(c-11.541,22.183) -12.175,22.183 -12.175,-13.75 ccw(c-11.275,-13.75) -11.275,-14.65 cw(c-11.275,-15.675) -10.25,-15.675 -10.25,-43.76 ccw(c-4.118,-43.76) -8.454,-48.096 -5.096,-51.454 ccw(c-0.76,-47.118) -0.76,-53.25 0,-53.25 0.76,-53.25 ccw(c0.76,-47.118) 5.096,-51.454 8.454,-48.096 ccw(c4.118,-43.76) 10.25,-43.76 10.25,-15.675 cw(c11.275,-15.675) 11.275,-14.65 ccw(c11.275,-13.75) 12.175,-13.75 12.175,22.183 ccw(c11.541,22.183) 11.541,22.817 ; 2.675,-13.159 2.675,8.841 10.875,8.841 10.875,-13.159 2.675,-13.159

## Text inside footprints (layer, text, board x,y; h text height)
C1: Bottom Overlay "+" at 3.787,10.005 h1 r180
SOLAR1: Top Overlay "+" at 8.976,21.406 h1.3; Top Overlay "-" at -8.194,21.38 h1.3; Bottom Overlay "+" at 8.976,21.381 h1.3; Bottom Overlay "-" at -8.194,21.354 h1.3